# Altium PCB SI_Demo.PcbDoc
Units mil, origin at the board's own origin, x right, y up, seen from the top; angles counter-clockwise.
Board outline 6000 x 4600 mil, 6 copper layers (Top Layer, GndPlane, 3V3Plane, 1V8Plane, 5VPlane, Bottom Layer); 17 components, 77 nets, 401 pads, 156 vias.
Unrouted connection lines stored in the file: 91.
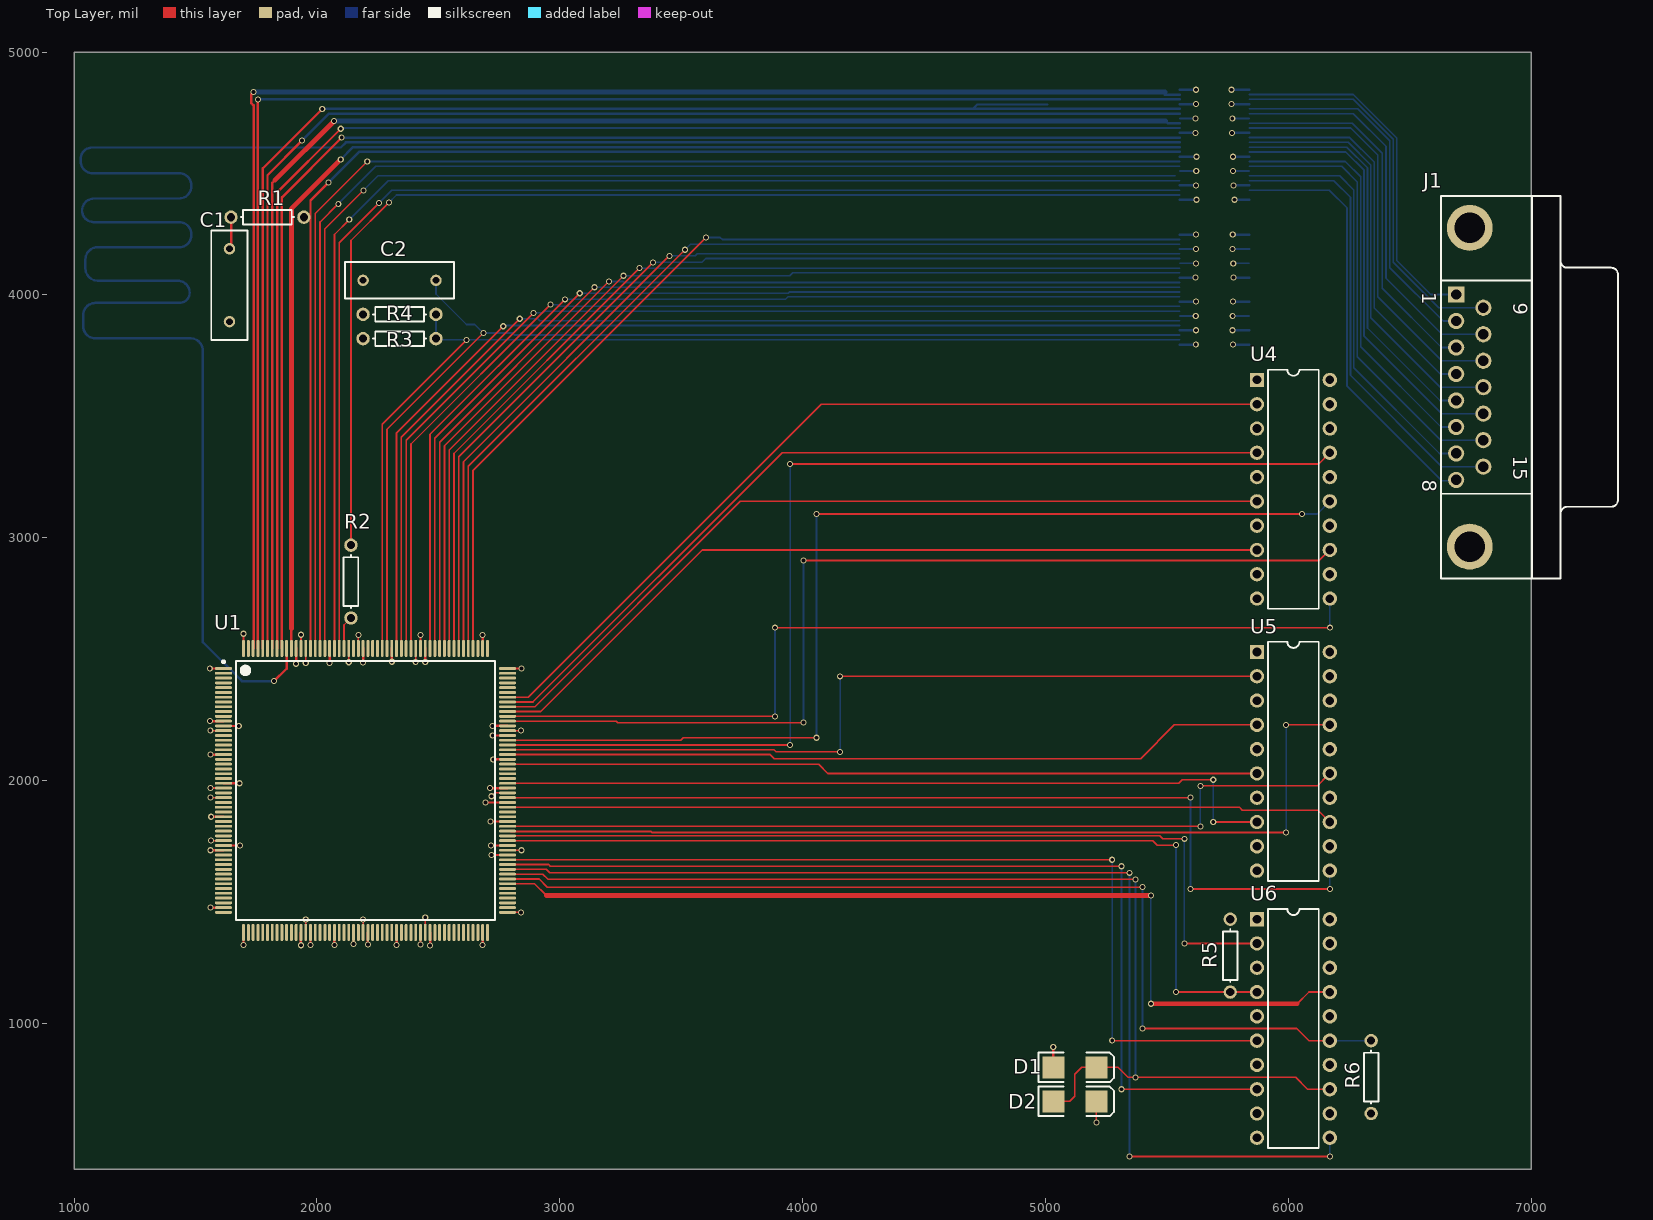
[diagram p0: Top Layer view]
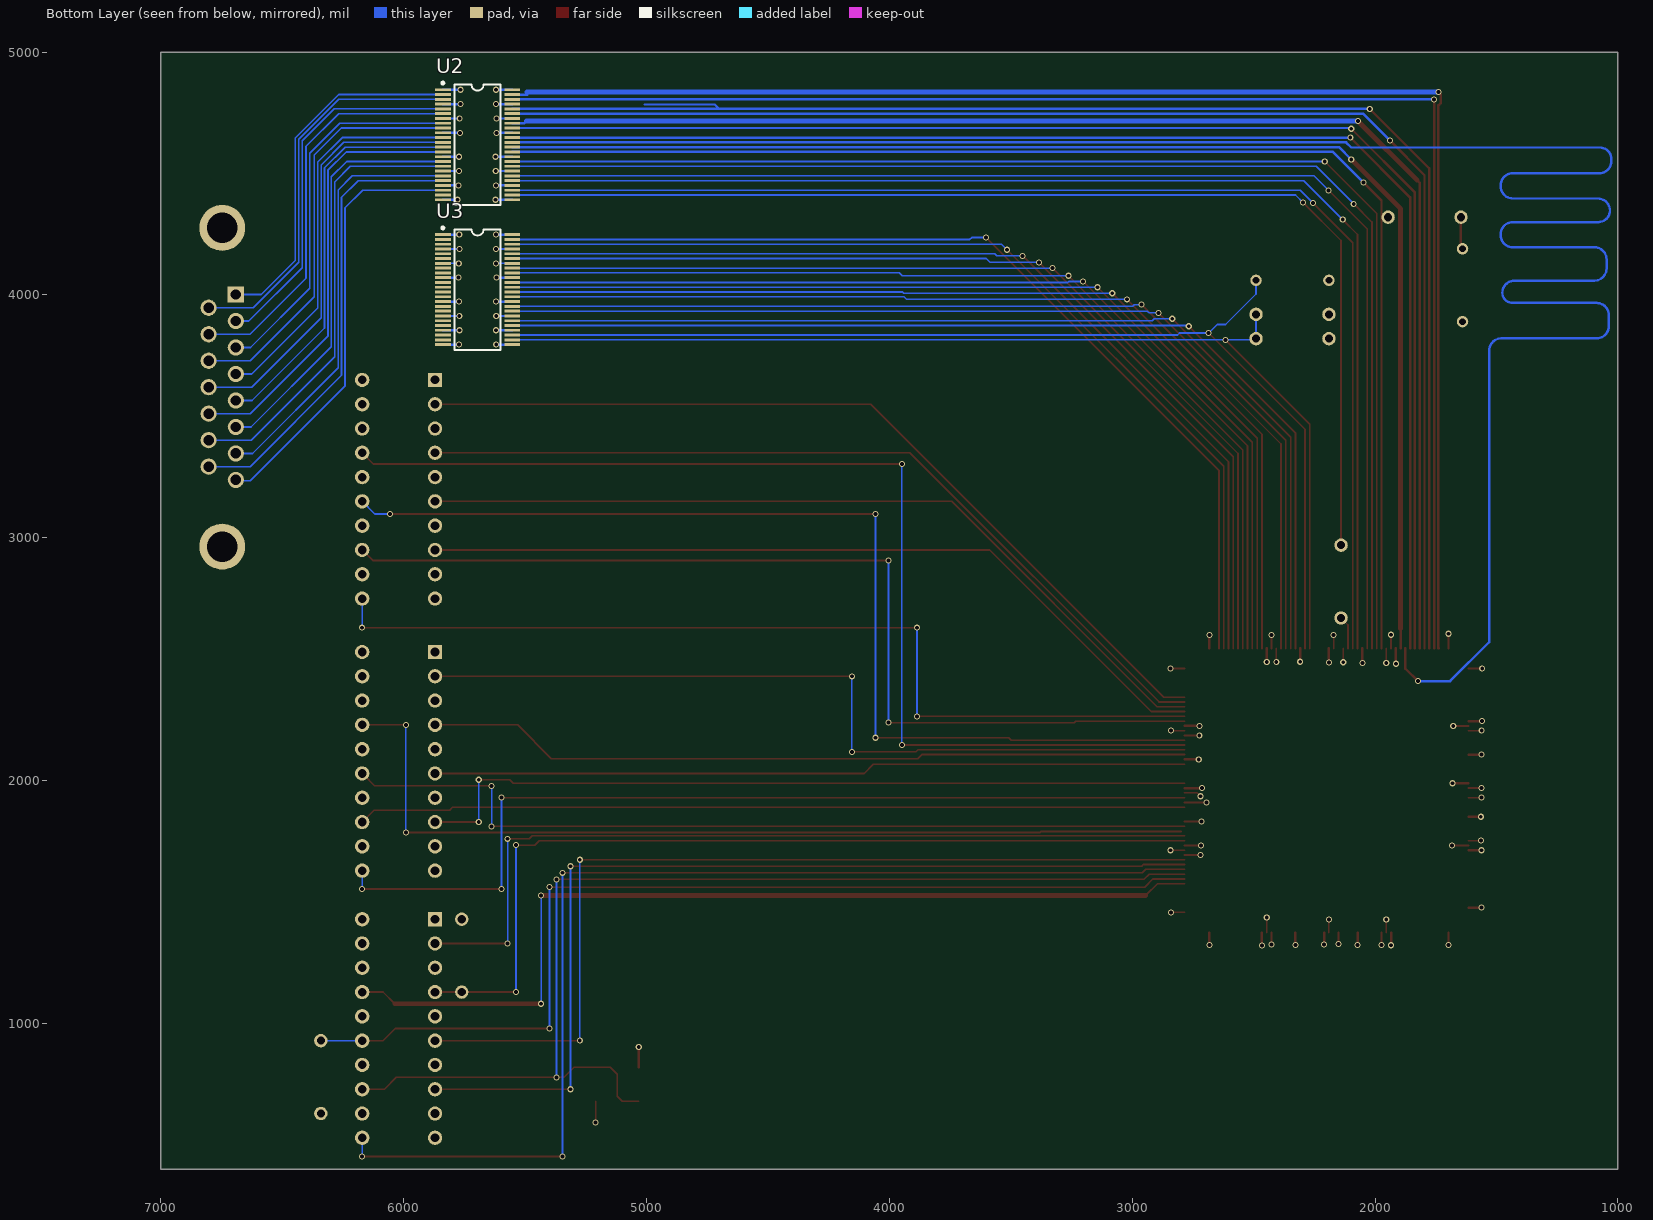
[diagram p1: Bottom Layer view, seen from below]
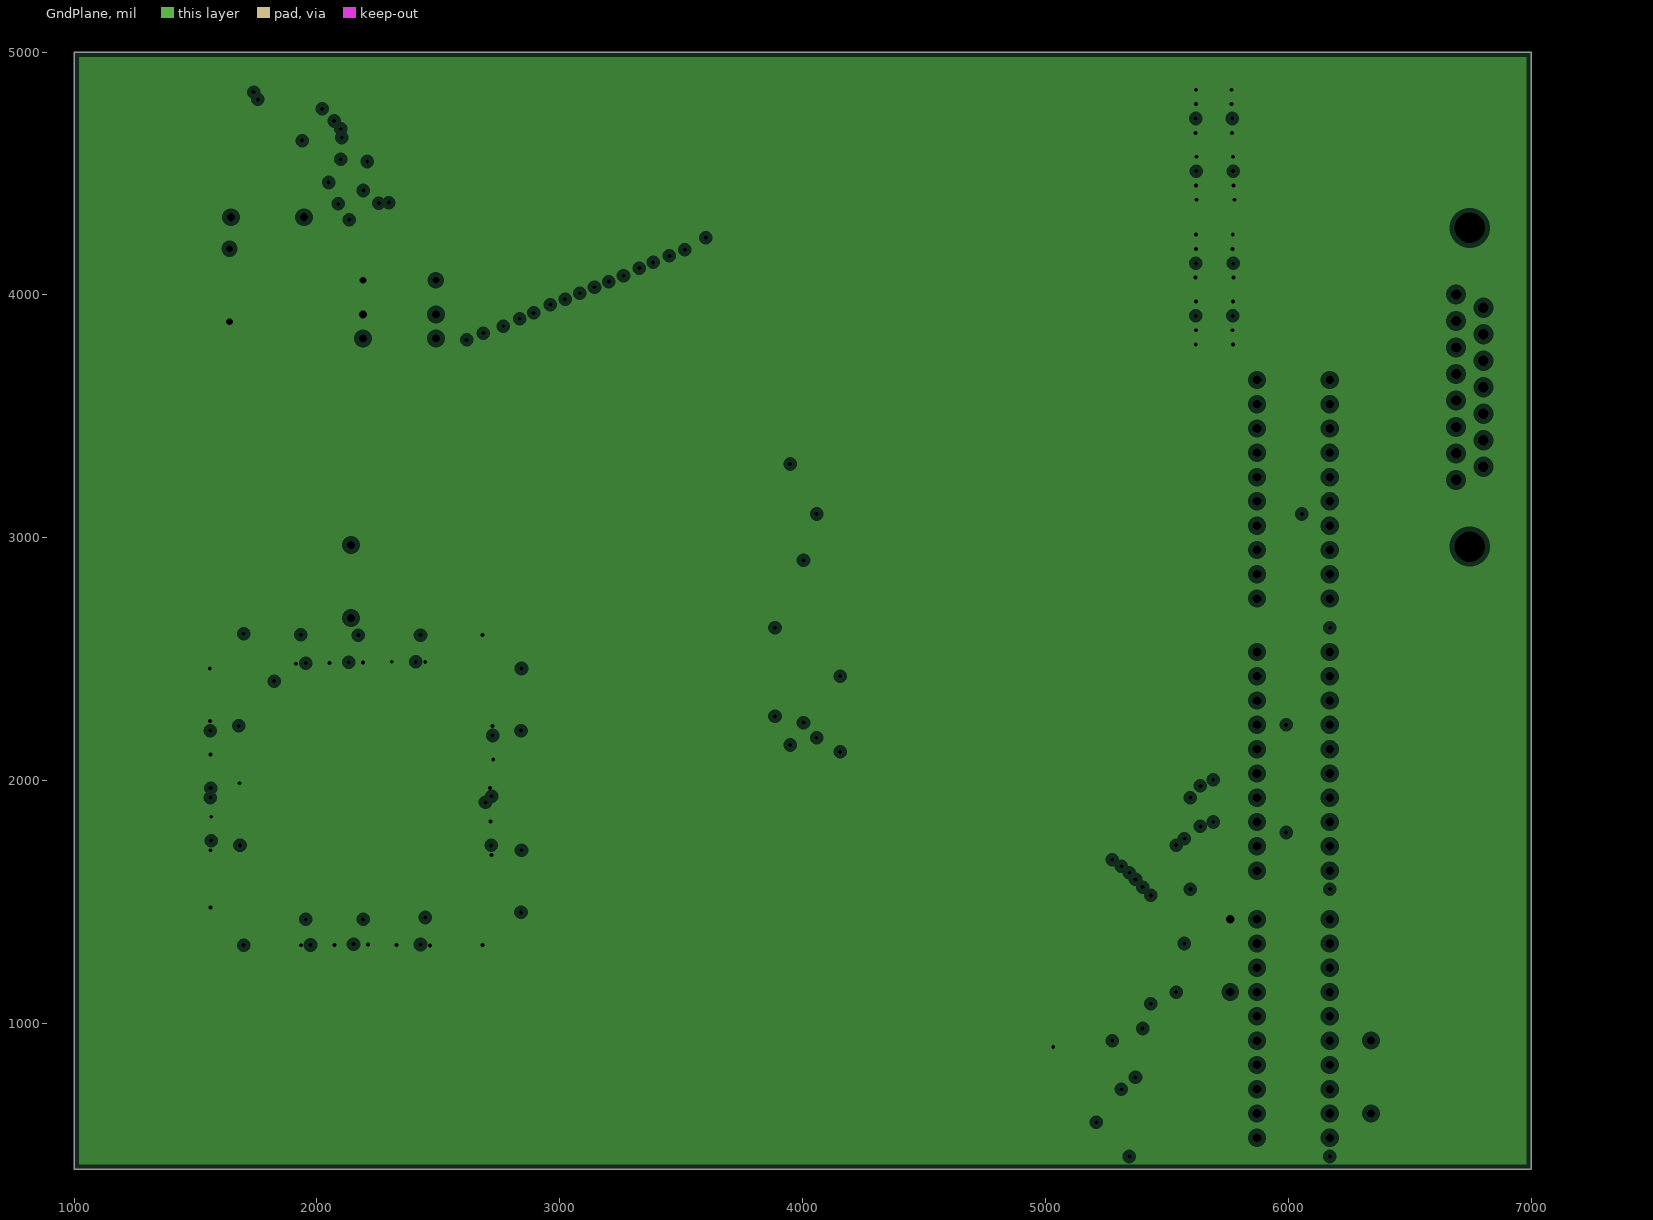
[diagram p2: GndPlane, clearances drawn from the general rule]
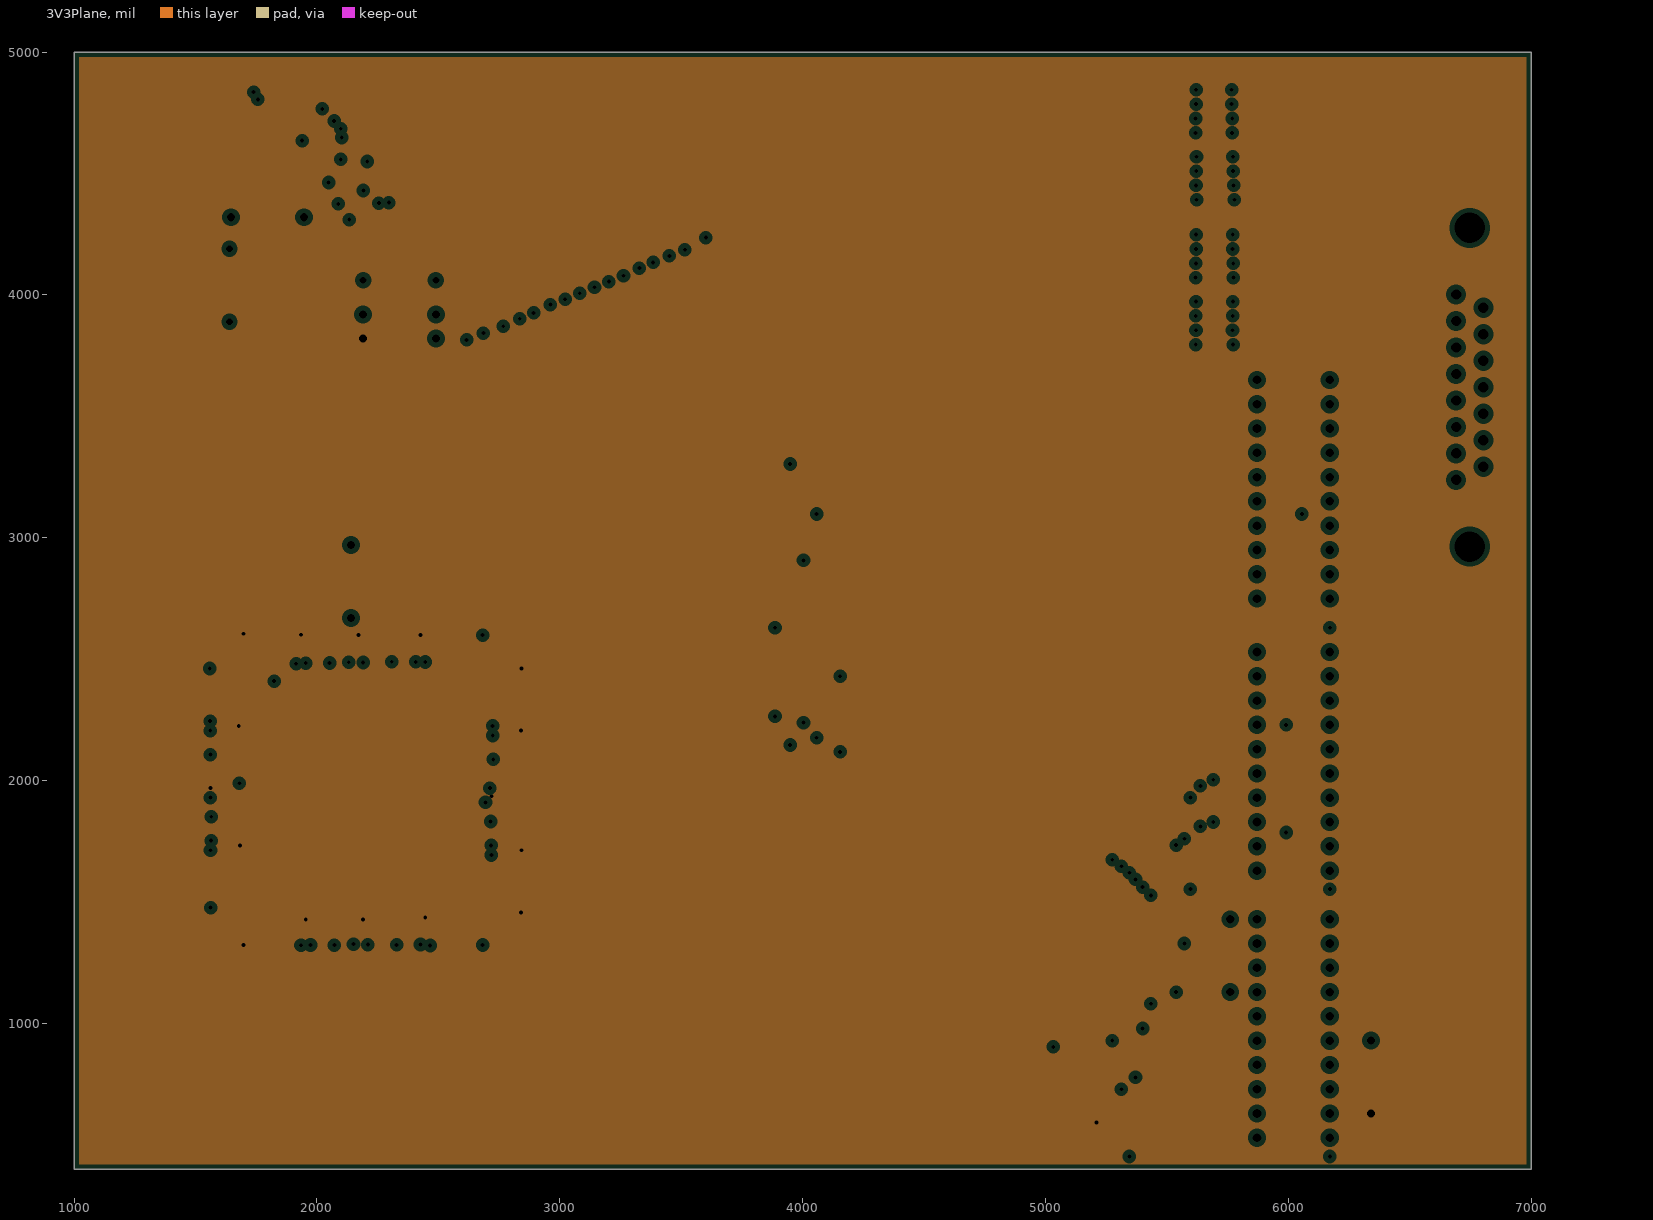
[diagram p3: 3V3Plane, clearances drawn from the general rule]
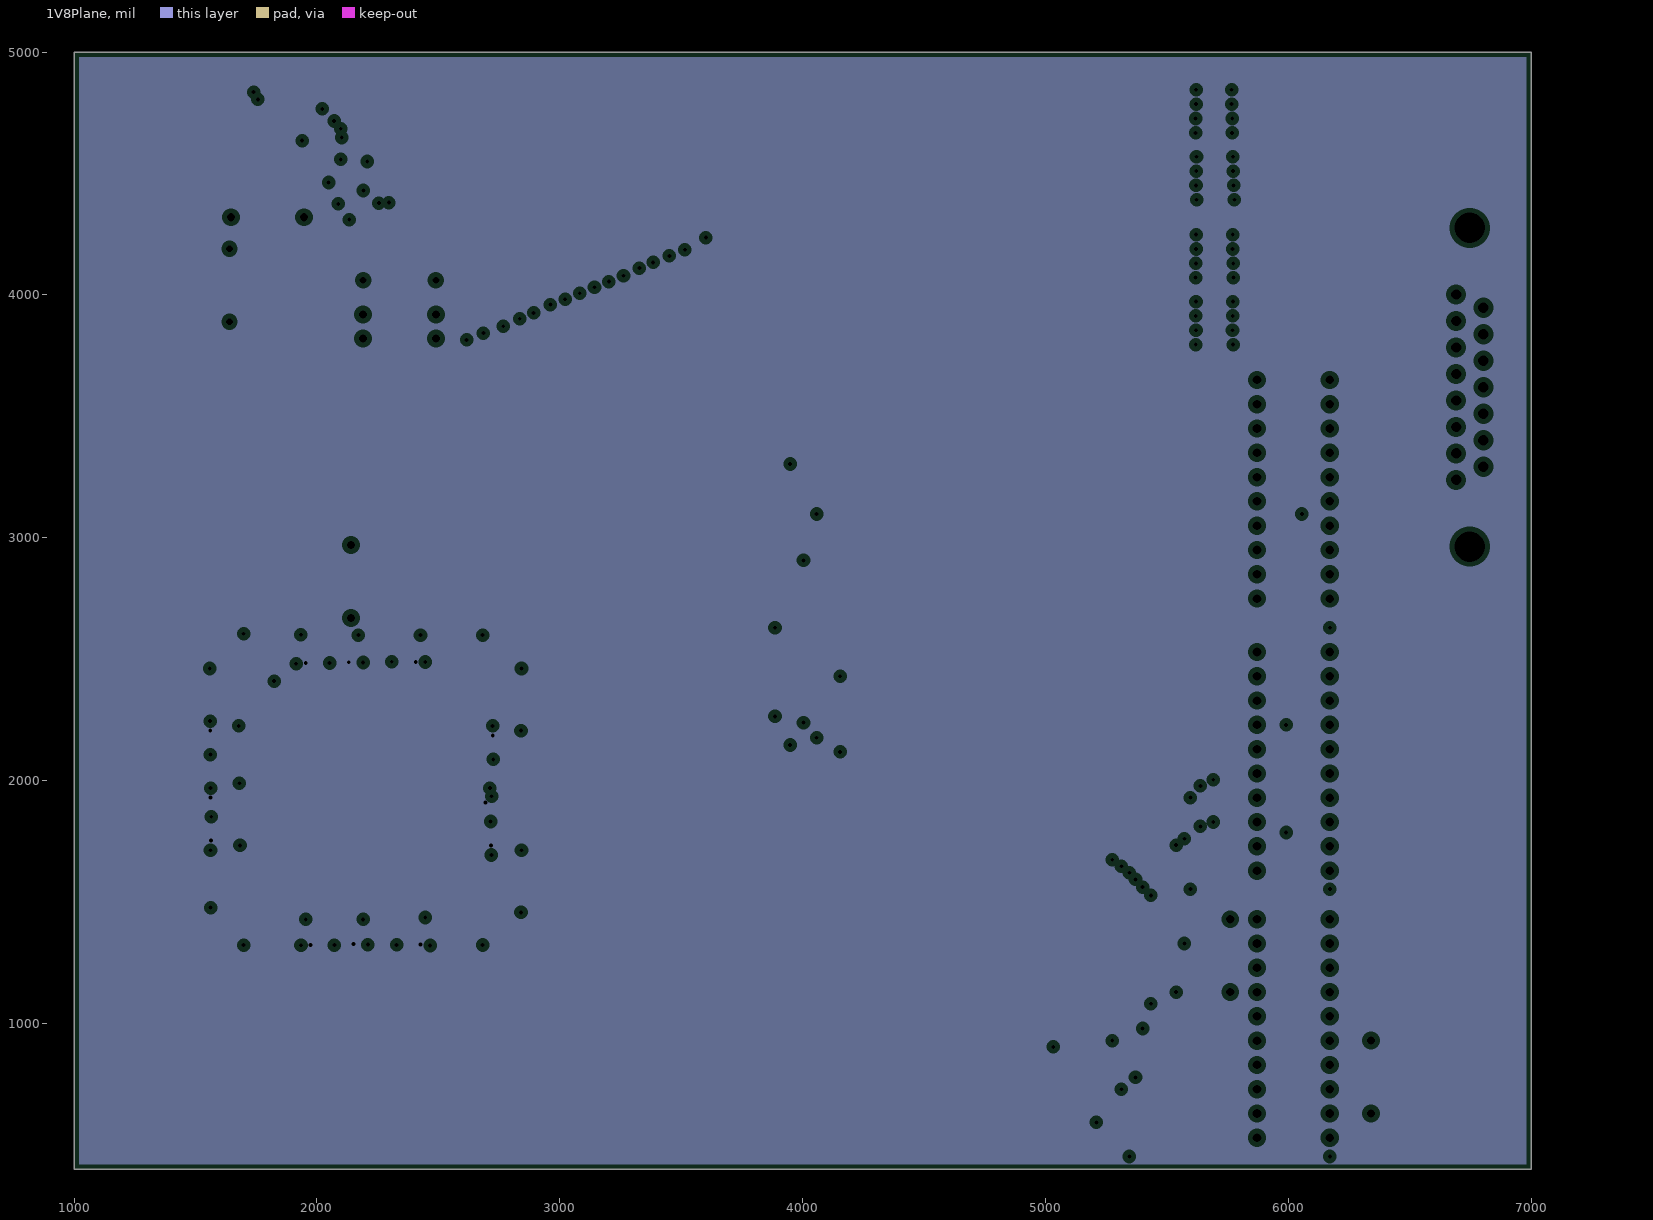
[diagram p4: 1V8Plane, clearances drawn from the general rule]
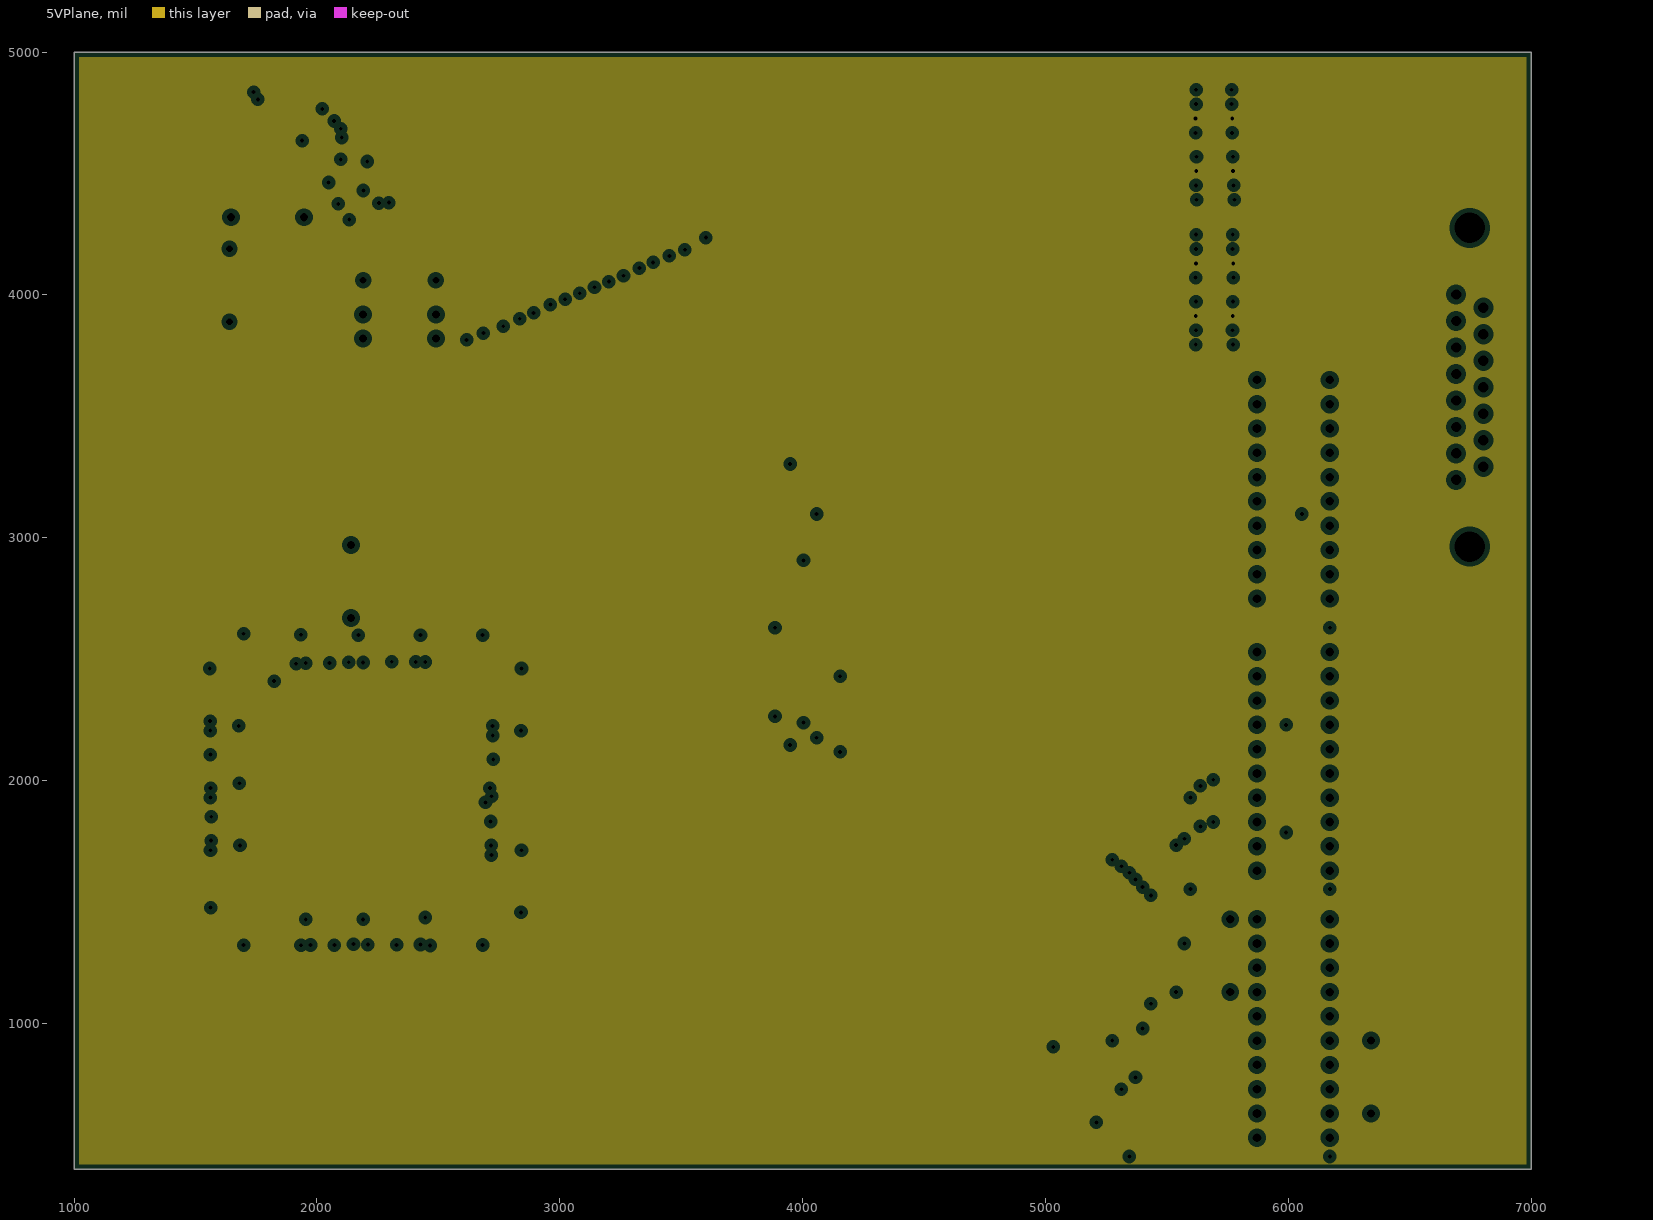
[diagram p5: 5VPlane, clearances drawn from the general rule]

## Layer stack, top to bottom
Top Layer: signal copper 1.4
Dielectric: core 12.6, FR-4, Dk 4.8
GndPlane: plane copper 1.4, net GND
Dielectric: prepreg 12.6, FR-4, Dk 4.8
3V3Plane: plane copper 1.4, net VCC3V3
Dielectric: core 12.6, FR-4, Dk 4.8
1V8Plane: plane copper 1.4, net VCC1V8
Dielectric: prepreg 12.6, FR-4, Dk 4.8
5VPlane: plane copper 1.4, net VCC5V
Dielectric: core 12.6, FR-4, Dk 4.8
Bottom Layer: signal copper 1.4

## Board outline
1000,400 7000,400 7000,5000 1000,5000

## Design rules (kind name [scope] priority, off if disabled: settings)
Clearance [All] p1: gap=7
FabricationTestPointUsage TestPointUsage [All] p1: valid=0 allowmultiple=FALSE
FabricationTestpoint Testpoint [All] p1: side=3 testpointundercomponent=TRUE minsize=40 maxsize=100 preferedsize=60 minholesize=0 maxholesize=40 preferedholesize=32 testpointgrid=1 allowsidetop=TRUE allowsidebottom=TRUE usegrid=TRUE gridtolerance=0.01
HoleSize [All] p1: absolutevalues=TRUE maxlimit=260 minlimit=1 maxpercent=80.000 minpercent=20.000
OvershootFalling [All] p1: maximum=500.0m
OvershootRising [All] p1: maximum=500.0m
PlaneClearance [All] p1: clearance=20
PlaneConnect [All] p1: planeconnectstyle=Relief reliefexpansion=20 reliefentries=4 reliefconductorwidth=10 reliefairgap=10
PolygonConnect [All] p1: connectstyle=Relief reliefconductorwidth=10 reliefentries=4 polygonreliefangle="90 Angle"
RoutingVias [All] p1: holewidth=16 width=25 viastyle="Through Hole" minholewidth=16 minwidth=25 maxholewidth=16 maxwidth=25
SilkscreenOverComponentPads [All] p1: minsilkscreentomaskgap=10
SolderMaskExpansion [All] p1: expansion=4
SupplyNets SupplyNets_VCC5V [InNet('VCC5V')] p1: voltage=5.000
SupplyNets SupplyNets_VCC1V8 [InNet('VCC1V8')] p2: voltage=1.800
SupplyNets SupplyNets_VCC3V3 [InNet('VCC3V3')] p3: voltage=3.300
SupplyNets SupplyNets_GND [InNet('GND')] p4: voltage=0.000
UndershootFalling [All] p1: maximum=500.0m
UndershootRising [All] p1: maximum=500.0m
Width [All] p1: maxlimit=20 minlimit=7 preferedwidth=7
22 further rules are at their usual default settings.

## Components (designator, comment, footprint, x,y, rotation, side; value= is the part's Value field where it differs from the comment)
C1 "Cap" RAD-0.3 1640,4040 r270 top
C2 "Cap" RAD-0.3 2340,4060 r0 top
D1 "D Schottky" SMB 5120,820 r0 top
D2 "D Schottky" SMB 5120,680 r0 top
J1 "D Connector 15" DSUB1.385-2H15 7120,3620 r270 top
R1 "Res1" AXIAL-0.3 1796.46,4320 r180 top
R2 "Res1" AXIAL-0.3 2140,2820 r90 top
R3 "Res1" AXIAL-0.3 2340,3820 r180 top
R4 "Res1" AXIAL-0.3 2340,3920 r0 top
R5 "Res1" AXIAL-0.3 5760,1280 r270 top
R6 "Res1" AXIAL-0.3 6340,780 r90 top
U1 "XC2S200E-6PQ208C" PQ208_N 2200,1960 r0 top
U2 "74AC16244DGGR" DGG048 5695,4618.19 r270 bottom
U3 "74AC16244DGGR" DGG048 5695,4021.81 r270 bottom
U4 "SN74S240N" N020 6020,3200 r270 top
U5 "SN74S240N" N020 6020,2080 r270 top
U6 "SN74S240N" N020 6020,980 r270 top

## Footprints (in the part's own frame and the unit in brackets; to place one, negate y for a bottom-side part, rotate by r counter-clockwise, add the part's x,y. Pads: shape width x height; smd on the part's side, far side on the other; paste and mask are expansions set on the pad)
AXIAL-0.3 [mm] "Resistor; 2 Leads"
  round 1.4 hole 0.85: 1(-3.81,0) 2(3.81,0)
  silkscreen extent -2.77,-0.76 2.77,0.76
DGG048 [mm] "Shrink Small Outline; 48 Leads; Body Width 6.1 mm; Pitch 0.5 mm"
  rect 0.3x1.65 smd: 1(-5.75,-3.625) 2(-5.25,-3.625) 3(-4.75,-3.625) 4(-4.25,-3.625) 5(-3.75,-3.625) 6(-3.25,-3.625) 7(-2.75,-3.625) 8(-2.25,-3.625) 9(-1.75,-3.625) 10(-1.25,-3.625) 11(-0.75,-3.625) 12(-0.25,-3.625) 13(0.25,-3.625) 14(0.75,-3.625) 15(1.25,-3.625) 16(1.75,-3.625) 17(2.25,-3.625) 18(2.75,-3.625) 19(3.25,-3.625) 20(3.75,-3.625) 21(4.25,-3.625) 22(4.75,-3.625) 23(5.25,-3.625) 24(5.75,-3.625) 25(5.75,3.625) 26(5.25,3.625) 27(4.75,3.625) 28(4.25,3.625) 29(3.75,3.625) 30(3.25,3.625) 31(2.75,3.625) 32(2.25,3.625) 33(1.75,3.625) 34(1.25,3.625) 35(0.75,3.625) 36(0.25,3.625) 37(-0.25,3.625) 38(-0.75,3.625) 39(-1.25,3.625) 40(-1.75,3.625) 41(-2.25,3.625) 42(-2.75,3.625) 43(-3.25,3.625) 44(-3.75,3.625) 45(-4.25,3.625) 46(-4.75,3.625) 47(-5.25,3.625) 48(-5.75,3.625)
  silkscreen extent -6.57,-3.75 6.3,2.4
DSUB1.385-2H15 [mm] "Connector; D Subminiature; 15 Position; Right Angle; Pitch 1.385 mm"
  rect 1.69x1.69 hole 1.09: 1(-9.695,-10.92)
  round 1.69 hole 1.09: 2(-6.925,-10.92) 3(-4.155,-10.92) 4(-1.385,-10.92) 5(1.385,-10.92) 6(4.155,-10.92) 7(6.925,-10.92) 8(9.695,-10.92) 9(-8.31,-8.08) 10(-5.54,-8.08) 11(-2.77,-8.08) 12(0,-8.08) 13(2.77,-8.08) 14(5.54,-8.08) 15(8.31,-8.08)
  round 4.8 hole 3.18: 16(-16.66,-9.5) 17(16.66,-9.5)
  silkscreen extent -20,-12.5 20,6
N020 [mm] "DIP; 20 Leads; Row Spacing 7.62 mm; Pitch 2.54 mm"
  rect 1.5x1.5 hole 0.9: 1(-11.43,-3.81)
  round 1.5 hole 0.9: 2(-8.89,-3.81) 3(-6.35,-3.81) 4(-3.81,-3.81) 5(-1.27,-3.81) 6(1.27,-3.81) 7(3.81,-3.81) 8(6.35,-3.81) 9(8.89,-3.81) 10(11.43,-3.81) 11(11.43,3.81) 12(8.89,3.81) 13(6.35,3.81) 14(3.81,3.81) 15(1.27,3.81) 16(-1.27,3.81) 17(-3.81,3.81) 18(-6.35,3.81) 19(-8.89,3.81) 20(-11.43,3.81)
  silkscreen extent -12.5,-2.65 12.5,2.65
PQ208_N [mm] "Shrink QFP, 208-Leads, Body 28x28mm, Pitch 0.5mm, IPC Medium Density"
  oval 1.8x0.3 smd: 1(-14.85,12.75) 2(-14.85,12.25) 3(-14.85,11.75) 4(-14.85,11.25) 5(-14.85,10.75) 6(-14.85,10.25) 7(-14.85,9.75) 8(-14.85,9.25) 9(-14.85,8.75) 10(-14.85,8.25) 11(-14.85,7.75) 12(-14.85,7.25) 13(-14.85,6.75) 14(-14.85,6.25) 15(-14.85,5.75) 16(-14.85,5.25) 17(-14.85,4.75) 18(-14.85,4.25) 19(-14.85,3.75) 20(-14.85,3.25) 21(-14.85,2.75) 22(-14.85,2.25) 23(-14.85,1.75) 24(-14.85,1.25) 25(-14.85,0.75) 26(-14.85,0.25) 27(-14.85,-0.25) 28(-14.85,-0.75) 29(-14.85,-1.25) 30(-14.85,-1.75) 31(-14.85,-2.25) 32(-14.85,-2.75) 33(-14.85,-3.25) 34(-14.85,-3.75) 35(-14.85,-4.25) 36(-14.85,-4.75) 37(-14.85,-5.25) 38(-14.85,-5.75) 39(-14.85,-6.25) 40(-14.85,-6.75) 41(-14.85,-7.25) 42(-14.85,-7.75) 43(-14.85,-8.25) 44(-14.85,-8.75) 45(-14.85,-9.25) 46(-14.85,-9.75) 47(-14.85,-10.25) 48(-14.85,-10.75) 49(-14.85,-11.25) 50(-14.85,-11.75) 51(-14.85,-12.25) 52(-14.85,-12.75) 105(14.85,-12.75) 106(14.85,-12.25) 107(14.85,-11.75) 108(14.85,-11.25) 109(14.85,-10.75) 110(14.85,-10.25) 111(14.85,-9.75) 112(14.85,-9.25) 113(14.85,-8.75) 114(14.85,-8.25) 115(14.85,-7.75) 116(14.85,-7.25) 117(14.85,-6.75) 118(14.85,-6.25) 119(14.85,-5.75) 120(14.85,-5.25) 121(14.85,-4.75) 122(14.85,-4.25) 123(14.85,-3.75) 124(14.85,-3.25) 125(14.85,-2.75) 126(14.85,-2.25) 127(14.85,-1.75) 128(14.85,-1.25) 129(14.85,-0.75) 130(14.85,-0.25) 131(14.85,0.25) 132(14.85,0.75) 133(14.85,1.25) 134(14.85,1.75) 135(14.85,2.25) 136(14.85,2.75) 137(14.85,3.25) 138(14.85,3.75) 139(14.85,4.25) 140(14.85,4.75) 141(14.85,5.25) 142(14.85,5.75) 143(14.85,6.25) 144(14.85,6.75) 145(14.85,7.25) 146(14.85,7.75) 147(14.85,8.25) 148(14.85,8.75) 149(14.85,9.25) 150(14.85,9.75) 151(14.85,10.25) 152(14.85,10.75) 153(14.85,11.25) 154(14.85,11.75) 155(14.85,12.25) 156(14.85,12.75)
  oval 0.3x1.8 smd: 53(-12.75,-14.85) 54(-12.25,-14.85) 55(-11.75,-14.85) 56(-11.25,-14.85) 57(-10.75,-14.85) 58(-10.25,-14.85) 59(-9.75,-14.85) 60(-9.25,-14.85) 61(-8.75,-14.85) 62(-8.25,-14.85) 63(-7.75,-14.85) 64(-7.25,-14.85) 65(-6.75,-14.85) 66(-6.25,-14.85) 67(-5.75,-14.85) 68(-5.25,-14.85) 69(-4.75,-14.85) 70(-4.25,-14.85) 71(-3.75,-14.85) 72(-3.25,-14.85) 73(-2.75,-14.85) 74(-2.25,-14.85) 75(-1.75,-14.85) 76(-1.25,-14.85) 77(-0.75,-14.85) 78(-0.25,-14.85) 79(0.25,-14.85) 80(0.75,-14.85) 81(1.25,-14.85) 82(1.75,-14.85) 83(2.25,-14.85) 84(2.75,-14.85) 85(3.25,-14.85) 86(3.75,-14.85) 87(4.25,-14.85) 88(4.75,-14.85) 89(5.25,-14.85) 90(5.75,-14.85) 91(6.25,-14.85) 92(6.75,-14.85) 93(7.25,-14.85) 94(7.75,-14.85) 95(8.25,-14.85) 96(8.75,-14.85) 97(9.25,-14.85) 98(9.75,-14.85) 99(10.25,-14.85) 100(10.75,-14.85) 101(11.25,-14.85) 102(11.75,-14.85) 103(12.25,-14.85) 104(12.75,-14.85) 157(12.75,14.85) 158(12.25,14.85) 159(11.75,14.85) 160(11.25,14.85) 161(10.75,14.85) 162(10.25,14.85) 163(9.75,14.85) 164(9.25,14.85) 165(8.75,14.85) 166(8.25,14.85) 167(7.75,14.85) 168(7.25,14.85) 169(6.75,14.85) 170(6.25,14.85) 171(5.75,14.85) 172(5.25,14.85) 173(4.75,14.85) 174(4.25,14.85) 175(3.75,14.85) 176(3.25,14.85) 177(2.75,14.85) 178(2.25,14.85) 179(1.75,14.85) 180(1.25,14.85) 181(0.75,14.85) 182(0.25,14.85) 183(-0.25,14.85) 184(-0.75,14.85) 185(-1.25,14.85) 186(-1.75,14.85) 187(-2.25,14.85) 188(-2.75,14.85) 189(-3.25,14.85) 190(-3.75,14.85) 191(-4.25,14.85) 192(-4.75,14.85) 193(-5.25,14.85) 194(-5.75,14.85) 195(-6.25,14.85) 196(-6.75,14.85) 197(-7.25,14.85) 198(-7.75,14.85) 199(-8.25,14.85) 200(-8.75,14.85) 201(-9.25,14.85) 202(-9.75,14.85) 203(-10.25,14.85) 204(-10.75,14.85) 205(-11.25,14.85) 206(-11.75,14.85) 207(-12.25,14.85) 208(-12.75,14.85)
  silkscreen extent -14.97,-13.55 13.55,13.57
RAD-0.3 [mm] "Capacitor; 2 Leads"
  round 1.2 hole 0.7: 1(-3.81,0) 2(3.81,0)
  silkscreen extent -5.71,-1.91 5.71,1.91
SMB [mm] "DO-214-AA/SMB; 2 C-Bend Leads; Body 5.3 x 3.6 mm, inc. leads (LxW)"
  rect 2.3x2.3 smd: 1(-2.25,0) 2(2.25,0)
  silkscreen extent -3.8,-1.55 4.1,1.55

## Part data
C1 C2: "Capacitor"
D1 D2: "Schottky Diode"
J1: "Receptacle Assembly, 15 Position, Right Angle"
R1 R2 R3 R4 R5 R6: "Resistor"
U1: "Spartan-IIE 1.8V FPGA, 208-Pin PQFP, Standard Performance, Commercial Grade"
U2 U3: "16-Bit Buffer/Line Driver with 3-State Outputs"
U4 U5 U6: "Octal Buffer and Line Driver with 3-State Outputs"

## Via types
v1: diameter 25, hole 16, Top Layer to Bottom Layer, 156 vias

## Nets (pads, with @x,y where several pads share a name; then routed paths per layer and width w, separated by ;. In a path a pad name is that pad's centre, name@x,y a point inside that pad or via, vN(x,y) a via of type N, cw(c..) or ccw(c..) an arc to the next point about the centre after c; other vN are vias at no path point)
A0: U1.160 U3.47 | length 4042.6
  Top Layer w7: U1.160 2642.91,3277.91 v1(3601,4236)
  Bottom Layer w7: v1(3601,4236) 3661,4236 3668.5,4228.5 U3.47
A1: U1.161 U3.46 | length 4057.5
  Top Layer w7: U1.161 2623.23,3294.23 v1(3515,4186)
  Bottom Layer w7: v1(3515,4186) 3537.82,4208.82 U3.46
A2: U1.162 U3.44 | length 4072.2
  Top Layer w7: U1.162 2603.54,3313.54 v1(3451,4161)
  Bottom Layer w7: v1(3451,4161) 3558,4161 3566.45,4169.45 U3.44@5552.28,4169.45
A3: U1.163 U3.43 | length 4095.6
  Top Layer w7: U1.163 2583.86,3333.86 v1(3384,4134)
  Bottom Layer w7: v1(3384,4134) 3585,4134 3600.76,4149.76 U3.43
A4: U1.164 U3.41 | length 4106.8
  Top Layer w7: U1.164 2564.17,3347.17 v1(3327.39,4110.39)
  Bottom Layer w7: v1(3327.39,4110.39) U3.41
A5: U1.165 U3.40 | length 4126.7
  Top Layer w7: U1.165 2544.49,3361.49 v1(3262,4079)
  Bottom Layer w7: v1(3262,4079) 3947,4079 3958.71,4090.71 U3.40
A6: U1.166 U3.38 | length 4142.7
  Top Layer w7: U1.166 2524.8,3377.8 v1(3202,4055)
  Bottom Layer w7: v1(3202,4055) 3261,4055 3264.66,4051.34 U3.38
A7: U1.167 U3.37 | length 4160.7
  Top Layer w7: U1.167 2505.12,3394.12 v1(3142.65,4031.65)
  Bottom Layer w7: v1(3142.65,4031.65) U3.37
A8: U1.168 U3.36 | length 4181.8
  Top Layer w7: U1.168 2485.43,3410.43 v1(3082,4007)
  Bottom Layer w7: v1(3082,4007) 3940.06,4007 3945.03,4011.97 U3.36
A9: U1.169 U3.35 | length 4202.3
  Top Layer w7: U1.169 2465.75,3425.75 v1(3022,3982)
  Bottom Layer w7: v1(3022,3982) 3929,3982 3939.28,3992.28 U3.35
A10: U1.173 U3.33 | length 4247.3
  Top Layer w7: U1.173 2387.01,3386.01 v1(2961,3960)
  Bottom Layer w7: v1(2961,3960) 2991,3960 2998.09,3952.91 U3.33
A11: U1.174 U3.32 | length 4262
  Top Layer w7: U1.174 2367.32,3401.32 v1(2892,3926)
  Bottom Layer w7: v1(2892,3926) 2931,3926 2938.23,3933.23 U3.32
A12: U1.175 U3.30 | length 4279.9
  Top Layer w7: U1.175 2347.64,3414.64 v1(2835,3902)
  Bottom Layer w7: v1(2835,3902) 2909,3902 2917.14,3893.86 U3.30
A13: U1.176 U3.29 | length 4294.9
  Top Layer w7: U1.176 2327.95,3431.95 2328,3432 ; 2327.95,3432 v1(2767,3871.05)
  Bottom Layer w7: v1(2767,3871.05) 2770.13,3874.17 U3.29
A14: C2.2 U1.178 U3.27 | length 4650.9
  Top Layer w7: U1.178 2288.58,3446.58 v1(2685,3843)
  Bottom Layer w7: C2.2 2490,4004 2616,3878 2650,3878 v1(2685,3843) 2805,3843 2813.2,3834.8 U3.27
A15: R3.1 R4.2 U1.179 U3.26 | length 4578.6
  Top Layer w7: U1.179 2268.9,3467.9 v1(2616.12,3815.12)
  Bottom Layer w7: R4.2 R3.1 2494.88,3815.12 v1(2616.12,3815.12) U3.26
B0: U1.150 U4.2 | length 3585
  Top Layer w7: U1.150 2869.86,2343.86 4076,3550 U4.2
B1: U1.149 U4.4 | length 3510.3
  Top Layer w7: U1.149 2889.17,2324.17 3915,3350 U4.4
B2: U1.148 U4.6 | length 3435.6
  Top Layer w7: U1.148 2897.49,2304.49 3743,3150 U4.6
B3: U1.147 U4.8 | length 3360.9
  Top Layer w7: U1.147 2920.8,2284.8 3586,2950 U4.8
B4: U1.146 U4.11 | length 3870.2
  Top Layer w7: U1.146 v1(3886,2265.12) ; v1(3886,2630) v1(6170,2630)
  Bottom Layer w7: v1(3886,2265.12) v1(3886,2630) ; v1(6170,2630) U4.11
B5: U1.145 U4.13 | length 4073.8
  Top Layer w7: U1.145 3232.57,2245.43 3239,2239 v1(4003,2239) ; v1(4003,2907) 6127,2907 U4.13
  Bottom Layer w7: v1(4003,2239) v1(4003,2907)
B6: U1.141 U4.15 | length 4332.2
  Top Layer w7: U1.141 3497.31,2166.69 3507.62,2177 v1(4057,2177) ; v1(4057,3098) v1(6055,3098)
  Bottom Layer w7: v1(4057,2177) v1(4057,3098) ; v1(6055,3098) 6118,3098 U4.15
B7: U1.140 U4.17 | length 4561.4
  Top Layer w7: U1.140 v1(3948,2147.01) ; v1(3948,3304) 6124,3304 U4.17
  Bottom Layer w7: v1(3948,2147.01) v1(3948,3304)
B8: U1.139 U5.2 | length 3399.8
  Top Layer w7: U1.139 3881.68,2127.32 3890,2119 v1(4154,2119) ; v1(4154,2430) U5.2
  Bottom Layer w7: v1(4154,2119) v1(4154,2430)
B9: U1.138 U5.4 | length 3149.8
  Top Layer w7: U1.138 3866.36,2107.64 3883,2091 5391,2091 5530,2230 U5.4
B10: U1.136 U5.6 | length 3101.2
  Top Layer w7: U1.136 4065.27,2068.27 4103.54,2030 U5.6
B11: U1.132 U5.8 | length 3265.3
  Top Layer w7: U1.132 5548.53,1989.53 5563,2004 v1(5690,2004) ; v1(5690,1830) U5.8
  Bottom Layer w7: v1(5690,1830) v1(5690,2004)
B12: U1.129 U5.11 | length 3837.8
  Top Layer w7: U1.129 v1(5596,1930.47) ; v1(5596,1554) v1(6170,1554)
  Bottom Layer w7: v1(5596,1554) v1(5596,1930.47) ; v1(6170,1554) U5.11
B13: U1.127 U5.13 | length 3410.7
  Top Layer w7: U1.127 5797.9,1891.1 5810,1879 6121,1879 U5.13
B14: U1.123 U5.15 | length 3573
  Top Layer w7: U1.123 v1(5637,1812.36) ; v1(5637,1979) 6119,1979 6160,2020 6160,2030 U5.15@6160,2034
  Bottom Layer w7: v1(5637,1812.36) v1(5637,1979)
B15: U1.122 U5.17 | length 3816.7
  Top Layer w7: U1.122@2798,1791 3375,1791 3379,1787 v1(5990,1787) ; v1(5990,2230) U5.17
  Bottom Layer w7: v1(5990,1787) v1(5990,2230)
B16: U1.121 U6.2 | length 3521.3
  Top Layer w7: U1.121 5470.01,1772.99 5482,1761 v1(5571,1761) ; v1(5571,1330) U6.2
  Bottom Layer w7: v1(5571,1330) v1(5571,1761)
B17: R5.2 U1.120 U6.4 | length 3697.9
  Top Layer w7: U1.120 5440.69,1753.31 5459,1735 v1(5537,1735) ; v1(5537,1130) R5.2 U6.4
  Bottom Layer w7: v1(5537,1130) v1(5537,1735)
B18: U1.116 U6.6 | length 3829.9
  Top Layer w7: U1.116 v1(5274,1674.57) ; v1(5274,930) U6.6
  Bottom Layer w7: v1(5274,930) v1(5274,1674.57)
B19: U1.115 U6.8 | length 4006.2
  Top Layer w7: U1.115 2954.12,1654.88 2961,1648 v1(5312,1648) ; v1(5312,730) U6.8
  Bottom Layer w7: v1(5312,730) v1(5312,1648)
B20: U1.114 U6.11 | length 4636.2
  Top Layer w7: U1.114 2944.8,1635.2 2959,1621 v1(5345,1621) ; v1(5345,453) v1(6170,453)
  Bottom Layer w7: v1(5345,453) v1(5345,1621) ; v1(6170,453) U6.11
B21: D1.2 D2.1 U1.113 U6.13 | length 4696.4
  Top Layer w7: U1.113 2929.49,1615.51 2951,1594 v1(5370,1594) ; D2.1 5099,680 5120,701 5120,792 5148,820 D1.2 5298,820 5339,779 v1(5370,779) 6029,779 6078,730 U6.13
  Bottom Layer w7: v1(5370,779) v1(5370,1594)
B22: R6.2 U1.112 U6.15 | length 4172.1
  Top Layer w7: U1.112 2914.17,1595.83 2948,1562 v1(5399,1562) ; v1(5399,980) 6034,980 6084,930 U6.15
  Bottom Layer w7: v1(5399,980) v1(5399,1562) ; U6.15 R6.2
B23: U1.111 U6.17 | length 3871.2
  Top Layer w7: U1.111 2895.86,1576.14 2944,1528 ; 6036,1082 6084,1130 U6.17
  Top Layer w20: 2944,1528 v1(5433,1528) ; v1(5433,1082) 6036,1082
  Bottom Layer w7: v1(5433,1082) v1(5433,1528)
D0: U1.206 U2.47 | length 6122.8
  Top Layer w10: U1.206 1739.18,2544.65 1739.18,4780 1730,4789.18 1730,4825.82 v1(1739.18,4835)
  Bottom Layer w10: 5491,4824.88 U2.47 ; 5491,4825 5491,4835
  Bottom Layer w20: v1(1739.18,4835) 5491,4835
D1: U1.205 U2.46 | length 6055.7
  Top Layer w10: U1.205 v1(1757.09,4805.2)
  Bottom Layer w10: v1(1757.09,4805.2) U2.46
D2: U1.204 U2.44 | length 6166.7
  Top Layer w10: U1.204 1776.77,4520.77 v1(2021.83,4765.83)
  Bottom Layer w10: v1(2021.83,4765.83) 4700,4765.83 ; 5006,4784 4718.17,4784 4700,4765.83 ; U2.44 4700,4765.83
D3: U1.203 U2.43 | length 5808.7
  Top Layer w10: U1.203 1796.46,4492.46 v1(1939,4635)
  Bottom Layer w10: v1(1939,4635) 2050.14,4746.14 U2.43
D4: U1.202 U2.41 | length 5762
  Top Layer w10: U1.202 1816.14,4461.14 1827,4472
  Top Layer w20: 1827,4472 v1(2071,4716)
  Bottom Layer w10: 5494,4716 5503.23,4706.77 U2.41
  Bottom Layer w20: v1(2071,4716) 5494,4716
D5: U1.201 U2.40 | length 5703.5
  Top Layer w10: U1.201 1835.83,4421.83 v1(2098,4684)
  Bottom Layer w10: v1(2098,4684) 2101.09,4687.09 U2.40
D6: U1.200 U2.38 | length 5655.9
  Top Layer w10: U1.200 1855.51,4401.51 v1(2102,4648)
  Bottom Layer w10: v1(2102,4648) 2102.28,4647.72 U2.38
D7: U1.199 U2.37 | length 9921.2
  Top Layer w10: v1(1824,2410) 1875.2,2461.2 U1.199
  Bottom Layer w10: v1(1824,2410) 1691,2410 1530,2571 1530,3771 ccw(c1480,3771) 1480,3821 1088,3821 cw(c1088,3871) 1038,3871 1038,3917 cw(c1088,3917) 1088,3967 1434,3967 ccw(c1434,4009) 1476,4009 ccw(c1426,4009) 1426,4059 1097,4059 cw(c1097,4109) 1047,4109 1047,4146 cw(c1097,4146) 1097,4196 1433,4196 ccw(c1433,4246) 1483,4246 1483,4250 ccw(c1433,4250) 1433,4300 1080,4300 cw(c1080,4347) 1033,4347 cw(c1083,4347) 1083,4397 1433,4397 ccw(c1433,4447) 1483,4447 1483,4451 ccw(c1433,4451) 1433,4501 1077,4501 cw(c1077,4551) 1027,4551 1027,4559 cw(c1075,4559) 1075,4607 2098,4607 2119.03,4628.03 U2.37
D8: U1.198 U2.36 | length 5572.6
  Top Layer w10: U1.198 1894.88,2626.88
  Top Layer w20: 1894.88,2626.88 1894.88,4354.88 v1(2098,4558)
  Bottom Layer w10: v1(2098,4558) 2148.35,4608.35 U2.36
D9: R1.1 U1.194 U2.35 | length 5532.1
  Top Layer w10: R1.1 1972.62,4320 1973.62,4319 U1.194 ; R1.1@1973.62,4320 1973.62,4388.62 v1(2048,4463)
  Bottom Layer w10: v1(2048,4463) 2173.66,4588.66 U2.35
D10: U1.193 U2.33 | length 5438.3
  Top Layer w7: U1.193 1993.31,4335.31 v1(2207.29,4549.29)
  Bottom Layer w7: v1(2207.29,4549.29) U2.33
D11: U1.192 U2.32 | length 5389.7
  Top Layer w7: U1.192 2012.99,4299.99 v1(2088,4375)
  Bottom Layer w7: v1(2088,4375) 2242.61,4529.61 U2.32
D12: U1.191 U2.30 | length 5317.5
  Top Layer w7: U1.191 2032.68,4271.68 v1(2191,4430)
  Bottom Layer w7: v1(2191,4430) 2251.24,4490.24 U2.30@5532.6,4490.24
D13: U1.189 U2.29 | length 5276.4
  Top Layer w7: U1.189 2072.05,4249.05 v1(2133,4310)
  Bottom Layer w7: v1(2133,4310) 2293.55,4470.55 U2.29
D14: U1.188 U2.27 | length 5220.3
  Top Layer w7: U1.188 2091.73,4214.73 v1(2255,4378)
  Bottom Layer w7: v1(2255,4378) 2308.18,4431.18 U2.27
D15: R2.1 U1.187 | length 137.2
  Top Layer w7: U1.187 2111.42,2641.42 R2.1
GND: C1.2 C2.1 D1.1 R4.1 R5.1 U1.1 U1.12 U1.19 U1.25 U1.32 U1.39 U1.51 U1.65 U1.72 U1.79 U1.85 U1.92 U1.103 U1.117 U1.124 U1.131 U1.137 U1.144 U1.158 U1.170 U1.177 U1.183 U1.190 U1.197 U2.1 U2.4 U2.10 U2.15 U2.21 U2.24 U2.25 U2.28 U2.34 U2.39 U2.45 U2.48 U3.1 U3.4 U3.10 U3.15 U3.21 U3.24 U3.25 U3.28 U3.34 U3.39 U3.45 U3.48 | length 3070.3
  Top Layer w10: v1(1558.97,2461.97) U1.1 ; v1(1560.57,2245.43) U1.12 ; v1(1561.36,2107.64) U1.19 ; v1(1562.06,1713.94) U1.39 ; v1(1562.28,1477.72) U1.51 ; v1(1564.73,1851.73) U1.32 ; U1.25 v1(1680.47,1989.53) ; v1(1914.57,2481.57) U1.197 ; v1(1934.25,1322.75) U1.65 ; v1(2052.36,2484.64) U1.190 ; v1(2072.05,1323.05) U1.72 ; v1(2190.16,2486.84) U1.183 ; v1(2209.84,1325.16) U1.79 ; v1(2308.27,2489.73) U1.177 ; v1(2327.95,1324.05) U1.85 ; v1(2446.06,2488.94) U1.170 ; v1(2465.75,1321.75) U1.92 ; v1(2682.28,1323.72) U1.103 ; U1.158 v1(2682.28,2599.72) ; v1(2711.84,1969.84) U1.131 ; v1(2715.05,1832.05) U1.124 ; v1(2718.25,1694.25) U1.117 ; v1(2723.25,2225.75) U1.144 ; v1(2726.05,2087.95) U1.137 ; D1.1 v1(5031.42,904.42)
  Bottom Layer w10: U3.25 v1(5618.19,3795.43) ; U3.28 v1(5619.13,3854.49) ; U3.34 v1(5618.98,3972.6) ; U3.39 v1(5617.4,4071.02) ; U3.45 v1(5619.49,4189.13) ; U3.48 v1(5619.57,4248.19) ; U2.25 v1(5621.81,4391.81) ; U2.28 v1(5619.13,4450.87) ; U2.34 v1(5621.02,4568.98) ; U2.39 v1(5617.6,4667.4) ; U2.45 v1(5619.49,4785.51) ; U2.48 v1(5619.57,4844.57) ; v1(5765.43,4844.57) U2.1 ; v1(5765.51,4785.51) U2.4 ; v1(5767.6,4667.4) U2.10 ; v1(5769.13,3854.49) U3.21 ; v1(5769.49,4189.13) U3.4 ; v1(5770.43,4248.19) U3.1 ; v1(5771.02,3972.6) U3.15 ; v1(5771.02,4568.98) U2.15 ; v1(5771.81,3795.43) U3.24 ; v1(5772.6,4071.02) U3.10 ; v1(5774.13,4450.87) U2.21 ; v1(5776.81,4391.81) U2.24
NetC1_1: C1.1 R1.2 | length 132.7
  Top Layer w10: C1.1 1646.46,4196.46 R1.2
NetJ1_1: J1.1 U2.2 | length 1488.6
  Bottom Layer w7: U2.2 6266.12,4824.88 6445,4646 6445,4142 6585.31,4001.69 J1.1
NetJ1_2: J1.2 U2.5 | length 1520.1
  Bottom Layer w7: U2.5 6285.57,4765.83 6417,4634.4 6417,4112 6636.36,3892.64 J1.2
NetJ1_3: J1.3 U2.8 | length 1560.5
  Bottom Layer w7: U2.8 6262.23,4706.77 6386,4583 6386,4027 6629.42,3783.58 J1.3
NetJ1_4: J1.4 U2.11 | length 1607.5
  Bottom Layer w7: U2.11 6252.28,4647.72 6353,4547 6353,3946 6624.47,3674.53 J1.4
NetJ1_5: J1.5 U2.13 | length 1670.4
  Bottom Layer w7: U2.13 6239.65,4608.35 6325,4523 6325,3864 6623.53,3565.47 J1.5
NetJ1_6: J1.6 U2.16 | length 1714.5
  Bottom Layer w7: U2.16 6233.71,4549.29 6297,4486 6297,3787 6627.58,3456.42 J1.6
NetJ1_7: J1.7 U2.19 | length 1754.6
  Bottom Layer w7: U2.19 6210.76,4490.24 6269,4432 6269,3700 6621.64,3347.36 J1.7
NetJ1_8: J1.8 U2.22 | length 1774.5
  Bottom Layer w7: U2.22 6167.82,4431.18 6241,4358 6241,3624 6630,3235 J1.8@6686.77,3235
NetJ1_9: J1.9 U2.3 | length 1616.1
  Bottom Layer w7: U2.3 6266,4805.2 6431,4640.2 6431,4134 6617.83,3947.17 J1.9
NetJ1_10: J1.10 U2.6 | length 1658.4
  Bottom Layer w7: U2.6 6266.86,4746.14 6401,4612 6401,4069 6631.89,3838.11 J1.10
NetJ1_11: J1.11 U2.9 | length 1702.5
  Bottom Layer w7: U2.9 6255.91,4687.09 6367,4576 6367,3993 6630.94,3729.06 J1.11
NetJ1_12: J1.12 U2.12 | length 1750.2
  Bottom Layer w7: U2.12 6245.97,4628.03 6339,4535 6339,3906 6625,3620 J1.12
NetJ1_13: J1.13 U2.14 | length 1810.7
  Bottom Layer w7: U2.14 6235.34,4588.66 6311,4513 6311,3830 6630.05,3510.95 J1.13
NetJ1_14: J1.14 U2.17 | length 1852.5
  Bottom Layer w7: U2.17 6218.39,4529.61 6283,4465 6283,3746 6627.11,3401.89 J1.14
NetJ1_15: J1.15 U2.20 | length 1881.4
  Bottom Layer w7: U2.20 6186.45,4470.55 6255,4402 6255,3669 6631.16,3292.84 J1.15
NetR2_2: R2.2 U2.26 | length 4743.9
  Top Layer w7: R2.2 2140,4224 v1(2296,4380)
  Bottom Layer w7: v1(2296,4380) 2327.5,4411.5 U2.26
VCC1V8: U1.14 U1.28 U1.37 U1.67 U1.76 U1.90 U1.119 U1.128 U1.142 U1.172 U1.186 U1.195 | length 700.8
  Top Layer w7: v1(1561.06,2206.06) U1.14 ; v1(1561.47,1930.47) U1.28 ; v1(1564.31,1753.31) U1.37 ; v1(1953.94,2483.94) U1.195 ; v1(1973.62,1323.62) U1.67 ; v1(2131.1,2487.9) U1.186 ; v1(2150.79,1327.21) U1.76 ; v1(2406.69,2489.31) U1.172 ; v1(2426.38,1325.62) U1.90 ; v1(2693.79,1910.79) U1.128 ; v1(2717.38,1733.62) U1.119 ; v1(2723.62,2186.38) U1.142
VCC3V3: D2.2 R3.2 R6.1 U1.13 U1.26 U1.38 U1.53 U1.66 U1.78 U1.91 U1.105 U1.118 U1.130 U1.143 U1.156 U1.171 U1.184 U1.196 U1.208 | length 1015.4
  Top Layer w7: v1(1562.16,1969.84) U1.26 ; U1.38 v1(1683.38,1733.62) ; U1.13 v1(1678.25,2225.75) ; v1(1698.03,1323.03) U1.53 ; U1.208 v1(1698.03,2604.97) ; v1(1934,2601) 1934.25,2600.75 U1.196 ; U1.66 v1(1953.94,1429.06) ; U1.184 v1(2170.47,2599.47) ; U1.78 v1(2190.16,1429.16) ; U1.171 v1(2426.38,2599.38) ; U1.91 v1(2446.06,1436.94) ; v1(2719,1936) 2733.16,1950.16 U1.130 ; U1.105 v1(2839.97,1458.03) ; U1.118 v1(2842.06,1713.94) ; U1.143 v1(2839.94,2206.06) ; U1.156 v1(2842.03,2461.97) ; v1(5208.58,593.42) D2.2
VCC5V: U2.7 U2.18 U2.31 U2.42 U3.7 U3.18 U3.31 U3.42 | length 532.7
  Bottom Layer w7: U3.31 v1(5618.08,3913.54) ; U3.42 v1(5618.46,4130.08) ; U2.31 v1(5620.08,4509.92) ; U2.42 v1(5617.46,4726.46) ; v1(5768.46,4726.46) U2.7 ; v1(5770.08,3913.54) U3.18 ; v1(5772.08,4509.92) U2.18 ; v1(5772.46,4130.08) U3.7
pads on no net: J1.16 J1.17 U1.2 U1.3 U1.4 U1.5 U1.6 U1.7 U1.8 U1.9 U1.10 U1.11 U1.15 U1.16 U1.17 U1.18 U1.20 U1.21 U1.22 U1.23 U1.24 U1.27 U1.29 U1.30 U1.31 U1.33 U1.34 U1.35 U1.36 U1.40 U1.41 U1.42 U1.43 U1.44 U1.45 U1.46 U1.47 U1.48 U1.49 U1.50 U1.52 U1.54 U1.55 U1.56 U1.57 U1.58 U1.59 U1.60 U1.61 U1.62 U1.63 U1.64 U1.68 U1.69 U1.70 U1.71 U1.73 U1.74 U1.75 U1.77 U1.80 U1.81 U1.82 U1.83 U1.84 U1.86 U1.87 U1.88 U1.89 U1.93 U1.94 U1.95 U1.96 U1.97 U1.98 U1.99 U1.100 U1.101 U1.102 U1.104 U1.106 U1.107 U1.108 U1.109 U1.110 U1.125 U1.126 U1.133 U1.134 U1.135 U1.151 U1.152 U1.153 U1.154 U1.155 U1.157 U1.159 U1.180 U1.181 U1.182 U1.185 U1.207 U2.23 U3.2 U3.3 U3.5 U3.6 U3.8 U3.9 U3.11 U3.12 U3.13 U3.14 U3.16 U3.17 U3.19 U3.20 U3.22 U3.23 U4.1 U4.3 U4.5 U4.7 U4.9 U4.10 U4.12 U4.14 U4.16 U4.18 U4.19 U4.20 U5.1 U5.3 U5.5 U5.7 U5.9 U5.10 U5.12 U5.14 U5.16 U5.18 U5.19 U5.20 U6.1 U6.3 U6.5 U6.7 U6.9 U6.10 U6.12 U6.14 U6.16 U6.18 U6.19 U6.20

## Polygon pours and split planes (outlines as drawn)
GND on GndPlane (split plane): 6979.9,420.1 1020.1,420.1 1020.1,4979.9 6979.9,4979.9
VCC3V3 on 3V3Plane (split plane): 6979.9,420.1 1020.1,420.1 1020.1,4979.9 6979.9,4979.9
VCC1V8 on 1V8Plane (split plane): 6979.9,420.1 1020.1,420.1 1020.1,4979.9 6979.9,4979.9
VCC5V on 5VPlane (split plane): 6979.9,420.1 1020.1,420.1 1020.1,4979.9 6979.9,4979.9

## Text inside footprints (layer, text, board x,y; h text height)
J1: Top Overlay "9" at 6924.13,3966.85 h59.06 r270; Top Overlay "15" at 6924.13,3337.13 h59.06 r270; Top Overlay "8" at 6550.12,3240 h59.06 r270; Top Overlay "1" at 6550.12,4011.54 h59.06 r270